# Altium PCB PCB1.PcbDoc
Units mm, origin at the board's own origin, x right, y up, seen from the top; angles counter-clockwise.
Board outline 100 x 100 mm, 4 copper layers (Top Layer, Internal Plane 1, Internal Plane 2, Bottom Layer); 103 components, 108 nets, 462 pads, 120 vias.
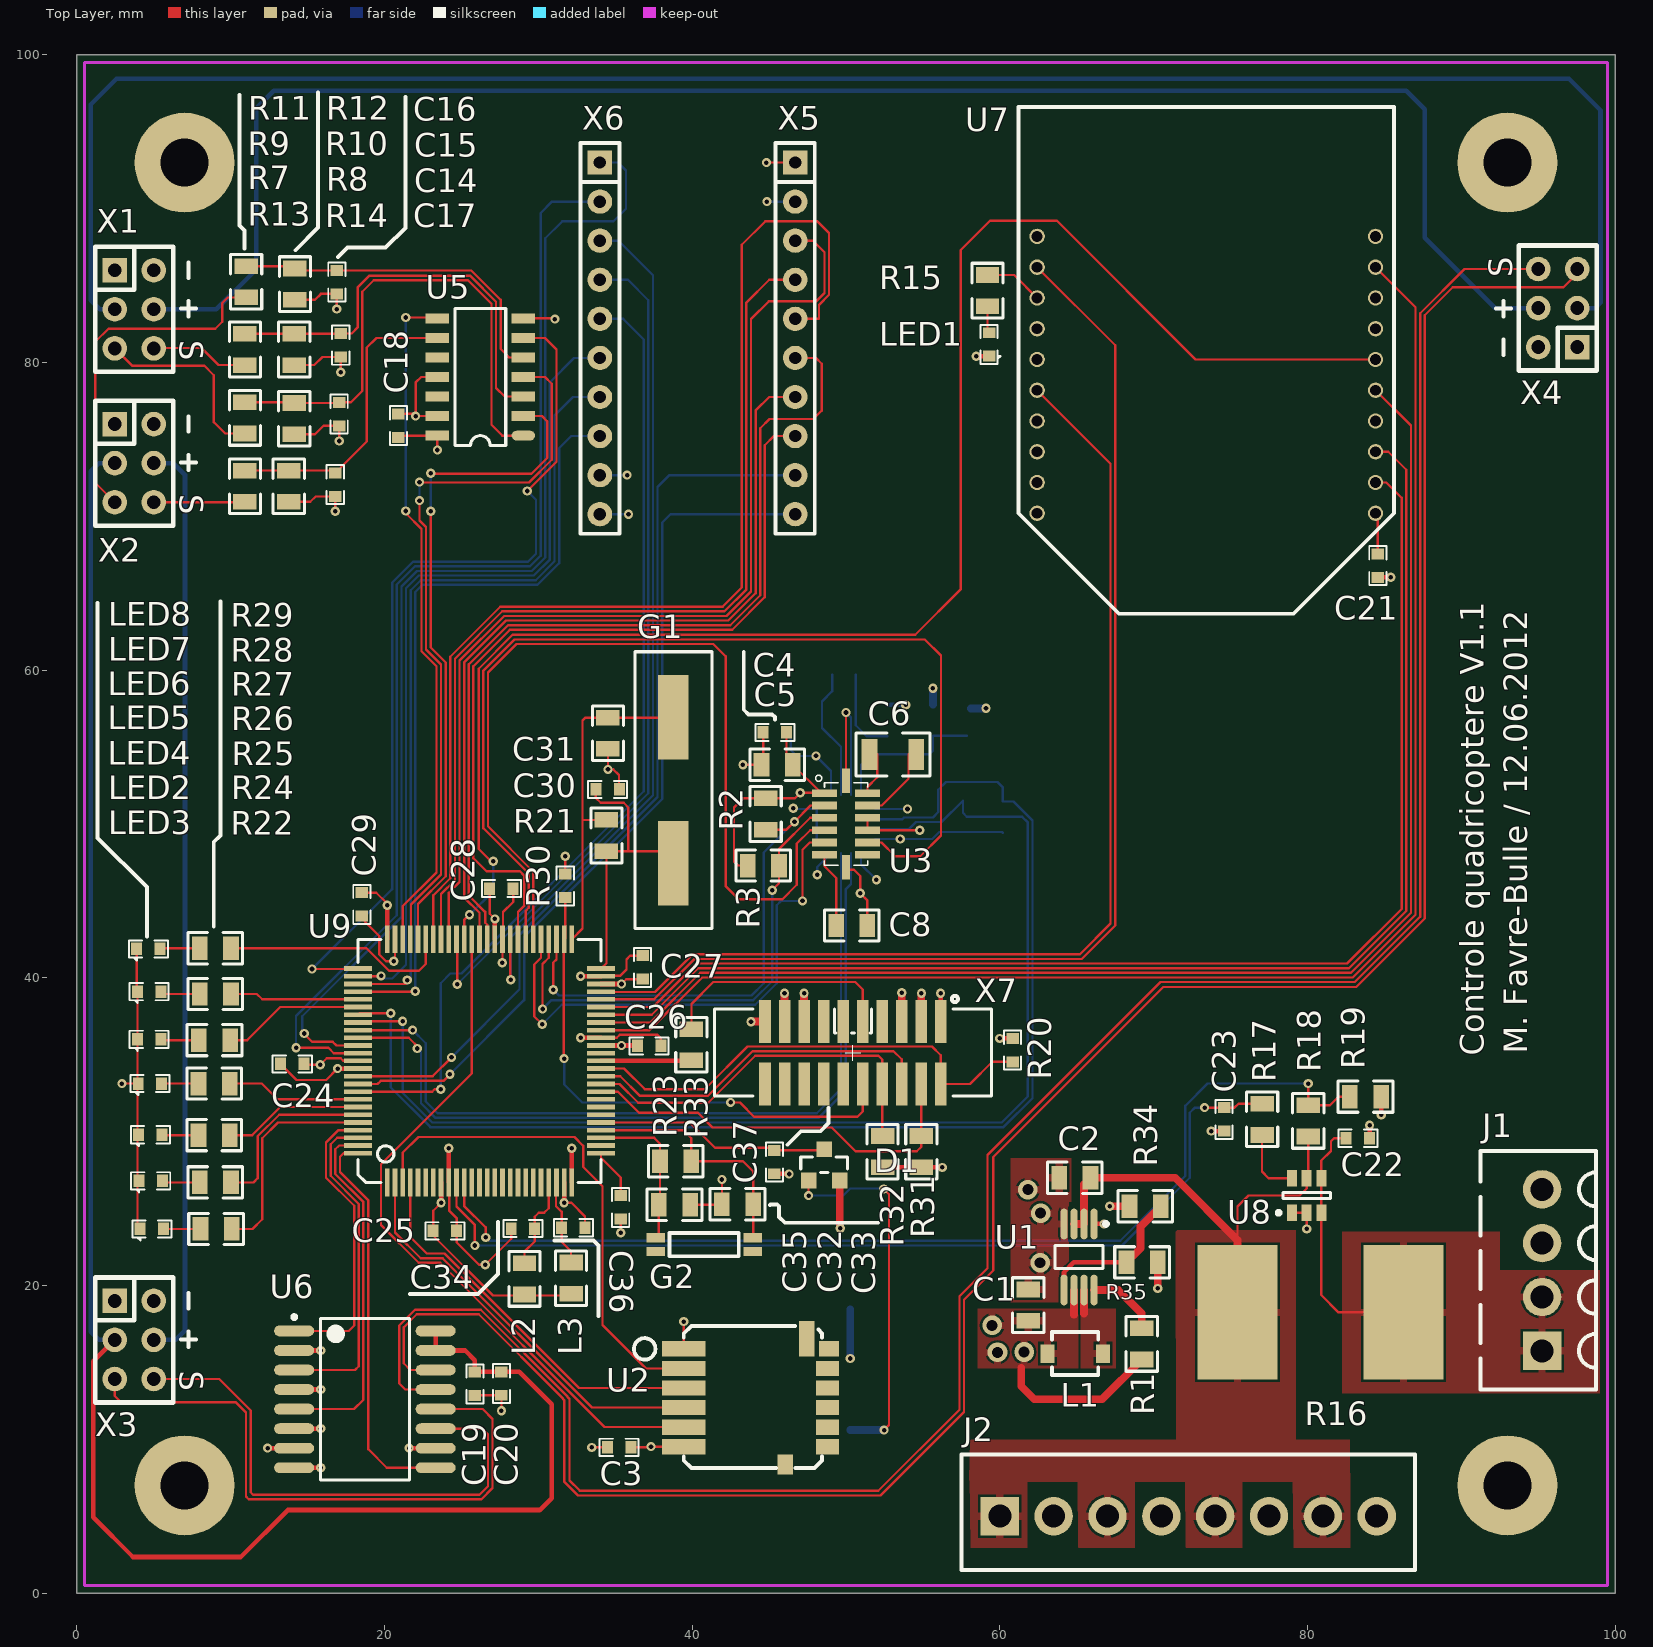
[diagram p0: Top Layer view]
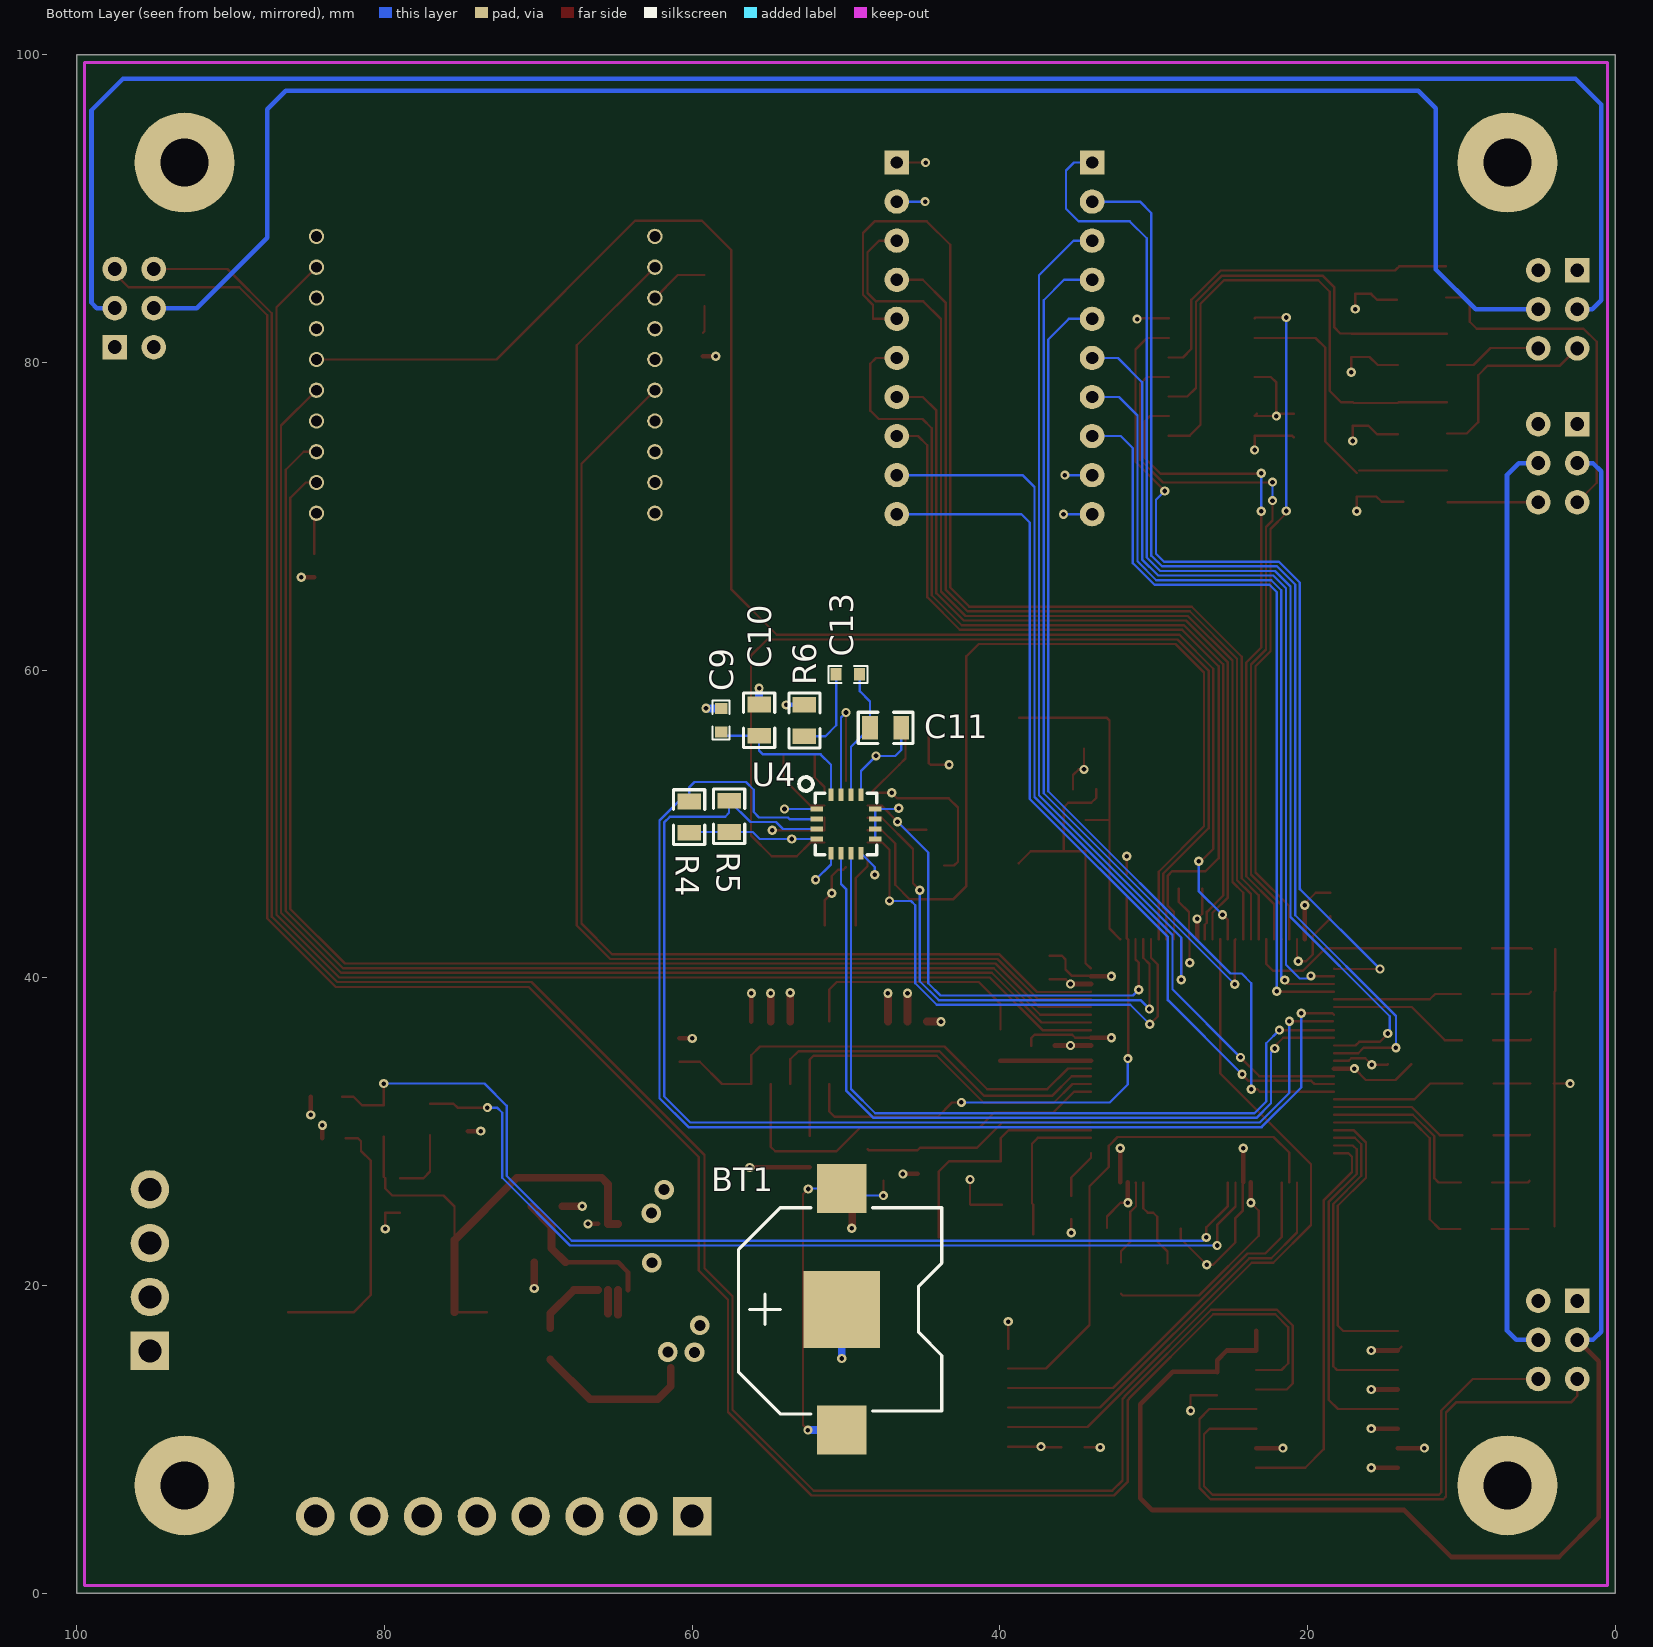
[diagram p1: Bottom Layer view, seen from below]
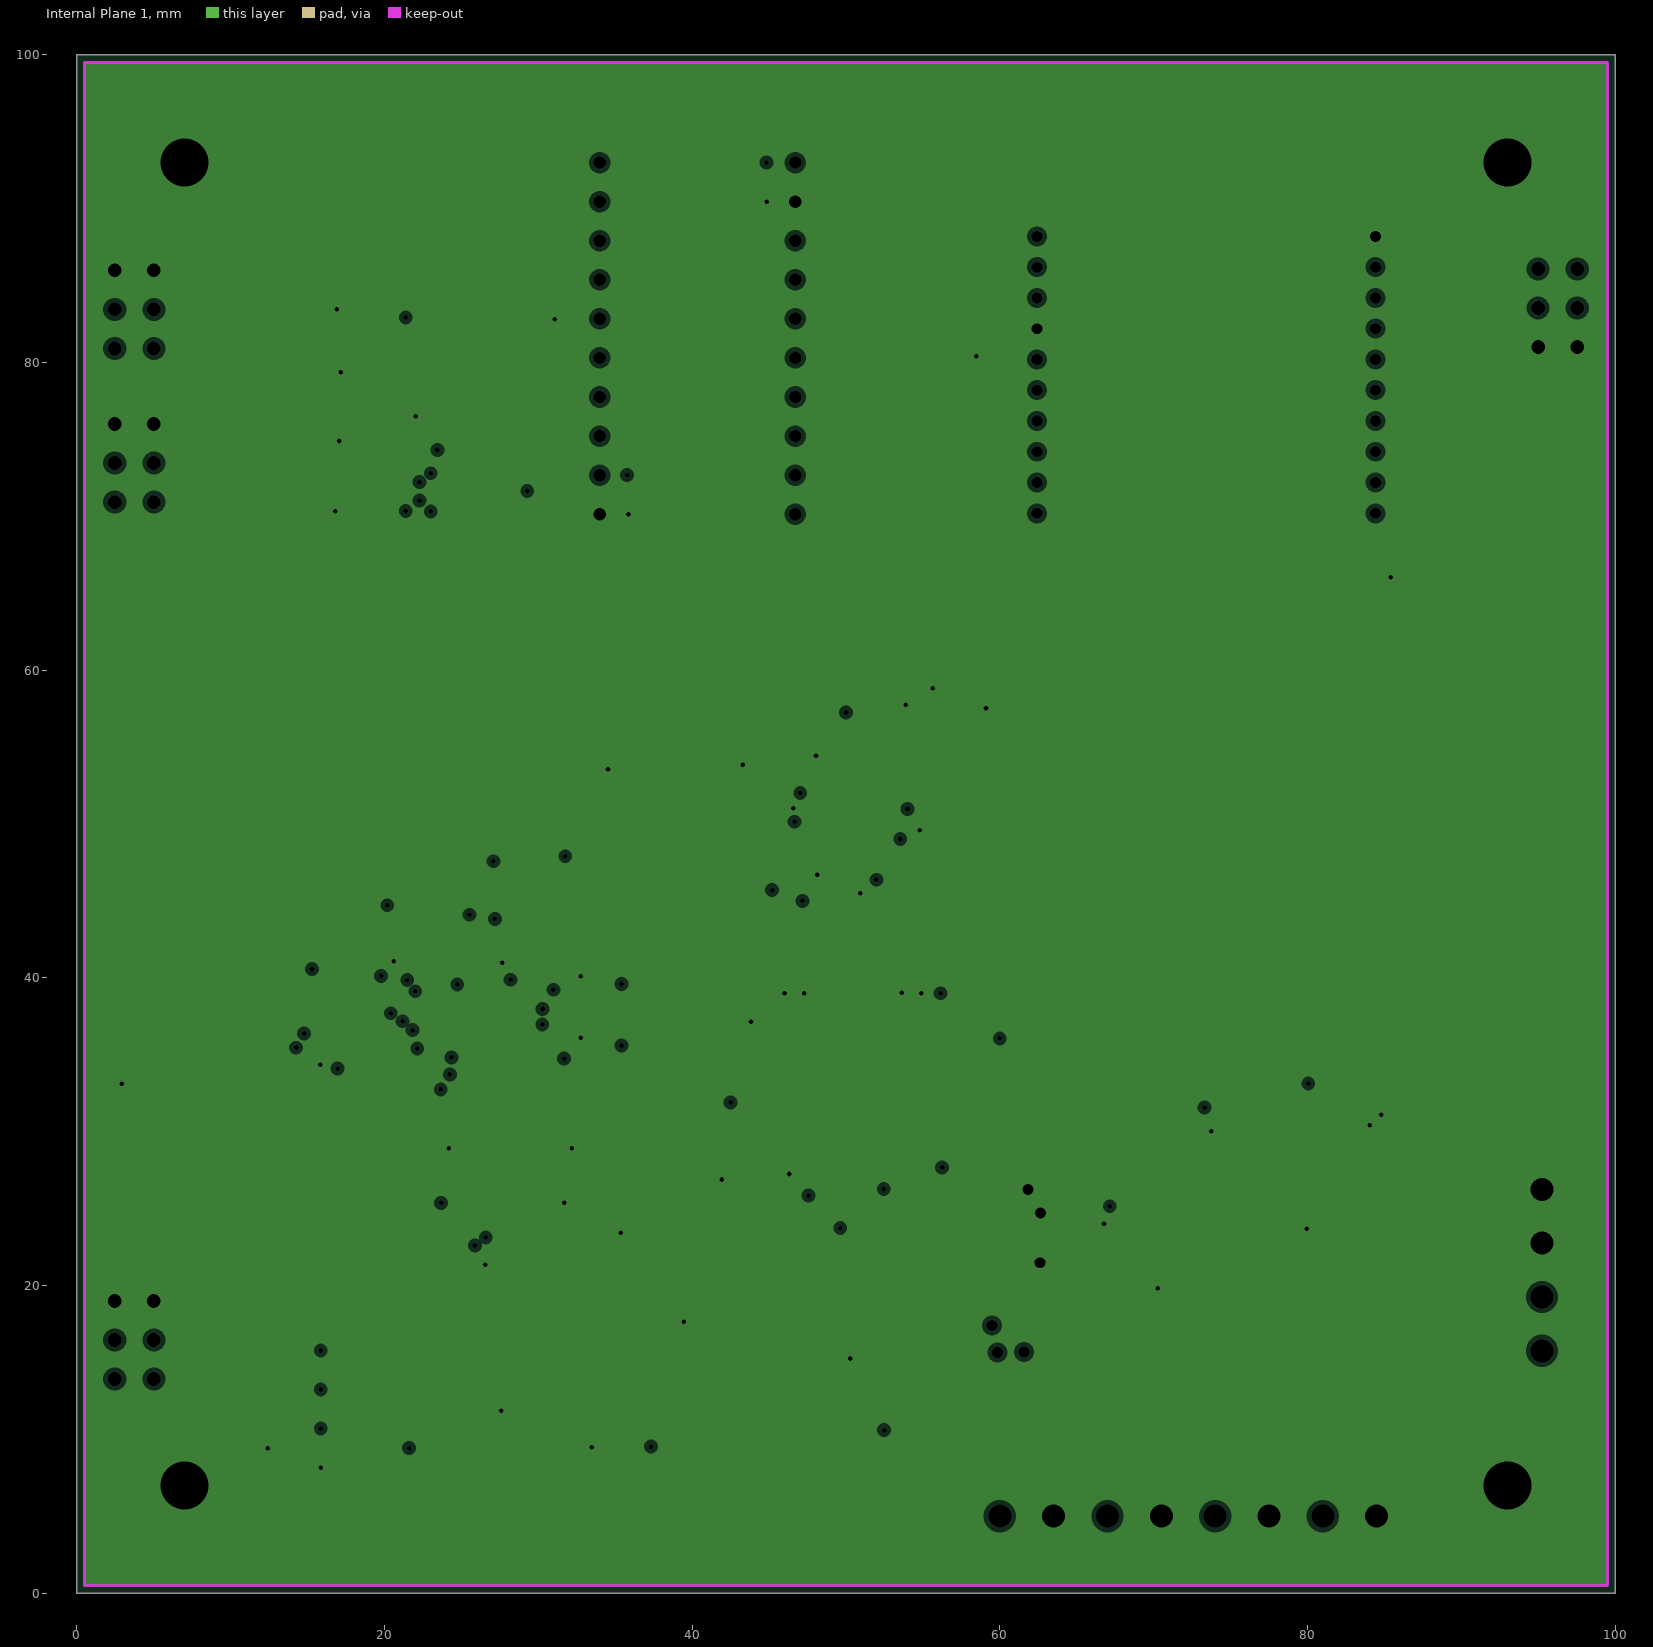
[diagram p2: Internal Plane 1, clearances drawn from the general rule]
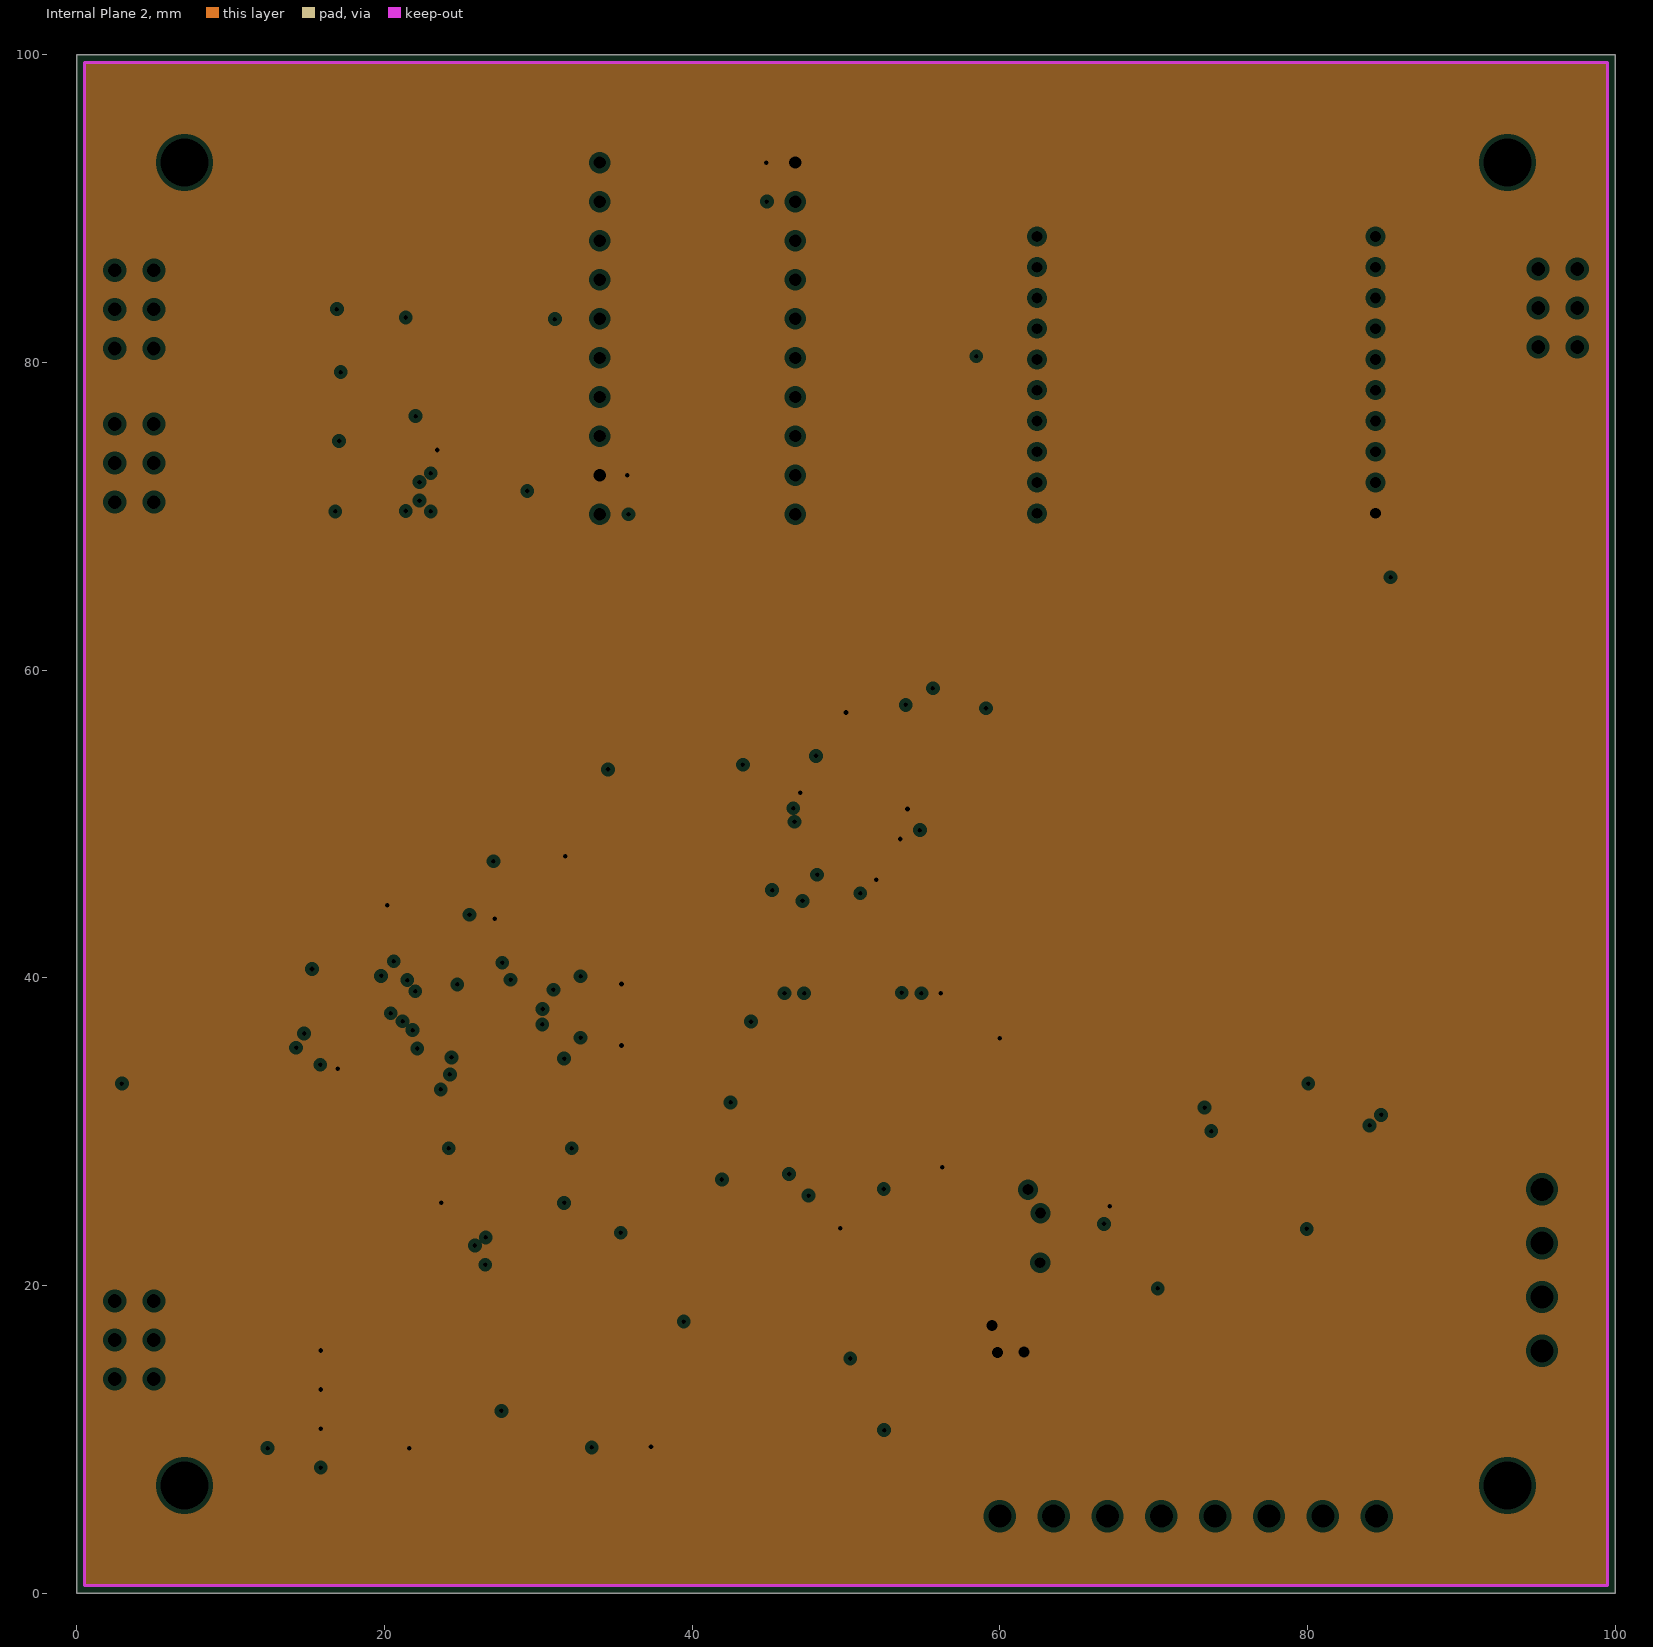
[diagram p3: Internal Plane 2, clearances drawn from the general rule]

## Layer stack, top to bottom
Top Layer: signal copper 0.0356
Dielectric: core 0.32, FR-4, Dk 4.8
Internal Plane 1: plane copper 0.0356, net GND
Dielectric: prepreg 0.32, FR-4, Dk 4.8
Internal Plane 2: plane copper 0.0356, net 3.3V
Dielectric: core 0.32, FR-4, Dk 4.8
Bottom Layer: signal copper 0.0356

## Board outline
0,0 100,0 100,100 0,100

## Design rules (kind name [scope] priority, off if disabled: settings)
Clearance [All] p1: gap=0.15
HoleSize [All] p1: absolutevalues=TRUE maxlimit=5 minlimit=0.3 maxpercent=80.000 minpercent=20.000
PlaneClearance [All] p1: clearance=0.3
PlaneConnect [All] p1: planeconnectstyle=Relief reliefexpansion=0.3 reliefentries=4 reliefconductorwidth=0.254 reliefairgap=0.2
PolygonConnect [All] p1: connectstyle=Relief reliefconductorwidth=0.5 reliefentries=4 polygonreliefangle="90 Angle"
RoutingVias [All] p1: holewidth=0.3 width=0.6 viastyle="Through Hole" minholewidth=0.3 minwidth=0.6 maxholewidth=0.3 maxwidth=0.6
SilkscreenOverComponentPads [All] p1: minsilkscreentomaskgap=0.254
SolderMaskExpansion [All] p1: expansion=0.102
Width [All] p1: maxlimit=5 minlimit=0.15 preferedwidth=0.3
24 further rules are at their usual default settings.

## Classes and differential pairs
component class Microcontroleur: BT1 C24 C25 C26 C27 C28 C29 C30 C31 C32 C33 C34 C35 C36 C37 D1 G1 G2 L2 L3 LED2 LED3 LED4 LED5 LED6 LED7 LED8 R20 R21 R22 R23 R24 R25 R26 R27 R28 R29 R30 R31 R32 R33 U9 X7
component class MesureAlimentation: C22 C23 J1 J2 R16 R17 R18 R19 U8
component class InterfaceExtension: X5 X6
component class InterfaceDataTelemetrie: C21 LED1 R15 U7
component class ControlCommande&Motors: C14 C15 C16 C17 C18 C19 C20 R7 R8 R9 R10 R11 R12 R13 R14 U5 U6 X1 X2 X3 X4
component class Capteurs: C3 C4 C5 C6 C8 C9 C10 C11 C13 R2 R3 R4 R5 R6 U2 U3 U4
component class Alimentation: C1 C2 L1 R1 R34 R35 U1

## Components (designator, comment, footprint, x,y, rotation, side; value= is the part's Value field where it differs from the comment)
BT1 "3000TR" 3000TR 50.275,18.45 r270 bottom
C1 "C2012X5R1A226M/1.25" 080501 61.85,18.725 r90 top
C2 "GRM21BR61E106KA73L" 080501 64.875,27 r180 top
C3 "GRM188R71E104KA01D" 060301 35.25,9.475 r90 top
C4 "GRM188R71E104KA01D" 060301 45.375,55.95 r270 top
C5 "08056D106KAT2A" 080501 45.525,53.85 r0 top
C6 "UMK212F224ZD-T" 120601 53.05,54.525 r180 top
C8 "C0805C475K4PACTU" 080501 50.375,43.4 r0 top
C9 "GRM188R71E104KA01D" 060301 58.125,56.75 r0 bottom
C10 "08056D106KAT2A" 080501 55.65,56.75 r270 bottom
C11 "C0805C103K4RACTU" 080501 47.425,56.25 r0 bottom
C13 "C2012Y5V1H474Z/0.85" 060301 49.875,59.725 r270 bottom
C14 "GRM188R71E104KA01D" 060301 17.05,76.65 r180 top
C15 "GRM188R71E104KA01D" 060301 17.15,81.125 r180 top
C16 "GRM188R71E104KA01D" 060301 16.9,85.225 r180 top
C17 "GRM188R71E104KA01D" 060301 16.8,72.059 r180 top
C18 "GRM188R71E104KA01D" 060301 20.9,75.9 r0 top
C19 "GRM188R71E104KA01D" 060301 25.875,13.6 r180 top
C20 "GRM188R71E104KA01D" 060301 27.6,13.625 r180 top
C21 "GRM188R71E104KA01D" 060301 84.575,66.8 r180 top
C22 "GRM188R71E104KA01D" 060301 83.275,29.575 r270 top
C23 "GRM188R71E104KA01D" 060301 74.575,30.8 r180 top
C24 "GRM188R71E104KA01D" 060301 14,34.4 r270 top
C25 "GRM188R71E104KA01D" 060301 23.925,23.55 r270 top
C26 "GRM188R71E104KA01D" 060301 37.2,35.575 r270 top
C27 "GRM188R71E104KA01D" 060301 36.775,40.675 r0 top
C28 "GRM188R71E104KA01D" 060301 27.6,45.8 r270 top
C29 "GRM188R71E104KA01D" 060301 18.525,44.775 r180 top
C30 "GQM2195C1H200JB01D" 060301 34.5,52.25 r270 top
C31 "GQM2195C1H200JB01D" 080501 34.525,55.9 r270 top
C32 "GRM21A5C2E120JW01D" 080501 38.85,25.25 r0 top
C33 "GRM21A5C2E120JW01D" 080501 42.95,25.275 r180 top
C34 "GRM188R71E104KA01D" 060301 29,23.7 r90 top
C35 "GRM188R71E104KA01D" 060301 35.35,25.075 r0 top
C36 "GRM188R71E104KA01D" 060301 32.275,23.75 r90 top
C37 "GRM188R71E104KA01D" 060301 45.35,28.025 r0 top
D1 "BAT54C" SOT2301 49.6,26.825 r180 top
G1 "ECS-40-20-5PX-TR" Crystal 38.775,52.2 r90 top
G2 "ECS-.327-12.5-38" Crystal2 40.775,22.65 r180 top
J1 "CON4" SL354D 95.25,15.75 r90 top
J2 "CON8" SL358D 60,5 r0 top
L1 "VLF3012ST-2R2M1R4" InductanceAlim 64.9,15.575 r180 top
L2 "BLM21AG601SN1D" 080501 29.1,20.425 r90 top
L3 "BLM21AG601SN1D" 080501 32.125,20.475 r90 top
LED1 "LG L29K-G2J1-24-Z" 060301_led 59.3,81.175 r180 top
LED2 "LG L29K-G2J1-24-Z" 060301_led 4.8,26.8 r90 top
LED3 "LG L29K-G2J1-24-Z" 060301_led 4.875,23.675 r90 top
LED4 "LG L29K-G2J1-24-Z" 060301_led 4.775,29.8 r90 top
LED5 "LG L29K-G2J1-24-Z" 060301_led 4.75,33.125 r90 top
LED6 "LG L29K-G2J1-24-Z" 060301_led 4.7,36 r90 top
LED7 "LG L29K-G2J1-24-Z" 060301_led 4.7,39.1 r90 top
LED8 "LG L29K-G2J1-24-Z" 060301_led 4.65,41.875 r90 top
R1 "ERJ-6GEYJ104V" 080501 69.225,16.2 r270 top
R2 "ERJ-6GEYJ103V" 080501 44.775,50.65 r90 top
R3 "ERJ-6GEYJ103V" 080501 44.625,47.3 r180 top
R4 "ERJ-6GEYJ103V" 080501 60.2,50.45 r270 bottom
R5 "ERJ-6GEYJ103V" 080501 57.6,50.5 r270 bottom
R6 "ERJ-6GEYJ103V" 080501 52.7,56.725 r90 bottom
R7 "RMCF0805JT820R" 080501 10.925,76.4 r90 top
R8 "ERJ-6GEYJ162V" 080501 14.125,76.35 r270 top
R9 "RMCF0805JT820R" 080501 10.925,80.85 r90 top
R10 "ERJ-6GEYJ162V" 080501 14.125,80.85 r270 top
R11 "RMCF0805JT820R" 080501 11,85.25 r90 top
R12 "ERJ-6GEYJ162V" 080501 14.175,85.1 r270 top
R13 "RMCF0805JT820R" 080501 10.925,71.959 r90 top
R14 "ERJ-6GEYJ162V" 080501 13.775,71.959 r270 top
R15 "RMCF0805JT820R" 080501 59.2,84.675 r270 top
R16 "WSLP59313L000FEB" 5.2x8.75 86.25,18.25 r0 top
R17 "ERJ-6GEYJ103V" 080501 77.05,30.8 r90 top
R18 "ERJ-6GEYJ822V" 080501 80.05,30.7 r90 top
R19 "ERJ-6GEYJ162V" 080501 83.775,32.275 r0 top
R20 "RC0603FR-071KL" 060301 60.825,35.3 r180 top
R21 "RMCF0805JT820R" 080501 34.425,49.25 r270 top
R22 "RMCF0805JT820R" 080501 9.05,23.675 r180 top
R23 "ERJ-6GEYJ103V" 080501 38.925,28.075 r180 top
R24 "RMCF0805JT820R" 080501 9,26.7 r180 top
R25 "RMCF0805JT820R" 080501 8.925,29.775 r180 top
R26 "RMCF0805JT820R" 080501 8.925,33.125 r180 top
R27 "RMCF0805JT820R" 080501 8.95,35.95 r180 top
R28 "RMCF0805JT820R" 080501 9,38.95 r180 top
R29 "RMCF0805JT820R" 080501 9,41.925 r180 top
R30 "RC0603FR-071KL" 060301 31.75,45.975 r180 top
R31 "ERJ-6GEYJ103V" 080501 54.9,28.7 r270 top
R32 "ERJ-6GEYJ103V" 080501 52.375,28.7 r270 top
R33 "RMCF0805JT820R" 080501 39.95,35.65 r270 top
R34 "ERJ-6GEYJ104V" 080501 69.45,25.15 r180 top
R35 "ERJ-6GEYJ104V" 080501 69.25,21.5 r180 top
U1 "TPS62160DGK" TSOP65P490-8AM 65.15,21.85 r270 top
U2 "MS5534-CM" MS5534B 39.45,15.875 r180 top
U3 "LSM303DLHCTR" LGA-14L 50,50 r90 top
U4 "L3G4200DTR" LGA-16 50,50 r180 bottom
U5 "SN74AHC14D" SO1401 29.025,75.25 r180 top
U6 "MIC4468ZWM" SOIC127P1030-16M 18.725,12.6 r0 top
U7 "XBP24BZ7WIT-004J" XBee-Pro 73.425,88.2 r180 top
U8 "MAX4173TEUT+T" SOT26A-6AM 79.95,25.85 r90 top
U9 "MK10DN512ZVLL10" QFP100-1 20.175,26.7 r0 top
X1 "CON6/CP" J2X3_2.54 5,86 r270 top
X2 "CON6/CP" J2X3_2.54 5,76 r270 top
X3 "CON6/CP" J2X3_2.54 5,19 r270 top
X4 "CON6/CP" J2X3_2.54 95,81 r90 top
X5 "CON10" SIP10 46.7,93 r270 top
X6 "CON10" SIP10 34,93 r270 top
X7 "FTSH-110-01-l-DV-K" FTSH-110-01-X-DV-EJ 50.45,35.125 r180 top

## Footprints (in the part's own frame and the unit in brackets; to place one, negate y for a bottom-side part, rotate by r counter-clockwise, add the part's x,y. Pads: shape width x height; smd on the part's side, far side on the other; paste and mask are expansions set on the pad)
5.2x8.75 [mm] "PowerResistorFootPrint"
  rect 5.2x8.75 smd: 1(0,0) 2(-10.8,0)
3000TR [mm] "HOLDER BATTERY COIN 12MM DIA SMD"
  rect 3.2x3.2 smd: 1(-7.85,0) 3(7.85,0)
  rect 5x5 smd: 2(0,0)
  silkscreen extent -6.6,-6.7 6.8,6.5
060301 [mil]
  rect 32.01x27.99 smd: 1(0,-30) 2(0,30)
  silkscreen extent -22,-50 22,50
060301_led [mil] "LED"
  rect 32.01x27.99 smd: 1(0,-30) 2(0,30)
  silkscreen extent -30,-50 22,50
080501 [mil]
  rect 40x60 smd: 1(-40,0) 2(40,0)
  silkscreen extent -70,-40 70,40
120601 [mil]
  rect 40x80 smd: 1(-60,0) 2(60,0)
  silkscreen extent -95,-55 95,55
Crystal [mm]
  rect 5.5x2 smd: 1(-4.75,0) 2(4.75,0)
  silkscreen extent -9,-2.5 9,2.5
Crystal2 [mm]
  rect 1.2x0.6 smd: 1(-3.15,-0.45) 2(3.15,-0.45) 3(3.15,0.45) 4(-3.15,0.45)
  silkscreen extent -2.25,-0.75 2.25,0.75
FTSH-110-01-X-DV-EJ [mm] "1.27mm pitch, 20 pin, terminal strip; vertical, double row, w/ejector shroud, SMT"
  rect 0.75x2.8 smd mask+0: 1(-5.715,-2.032) 2(-5.715,2.032) 3(-4.445,-2.032) 4(-4.445,2.032) 5(-3.175,-2.032) 6(-3.175,2.032) 7(-1.905,-2.032) 8(-1.905,2.032) 9(-0.635,-2.032) 10(-0.635,2.032) 11(0.635,-2.032) 12(0.635,2.032) 13(1.905,-2.032) 14(1.905,2.032) 15(3.175,-2.032) 16(3.175,2.032) 17(4.445,-2.032) 18(4.445,2.032) 19(5.715,-2.032) 20(5.715,2.032)
  silkscreen extent -9,-3.7 9,2.8
InductanceAlim [mm]
  rect 0.9x1.2 smd: 1(-1.8,0) 2(1.8,0)
  silkscreen extent -1.5,-1.4 1.5,1.4
J2X3_2.54 [mm]
  rect 1.6x1.6 hole 0.9: 1(0,-2.54)
  round 1.6 hole 0.9: 2(0,0) 3(2.54,-2.54) 4(2.54,0) 5(5.08,-2.54) 6(5.08,0)
  silkscreen extent -1.52,-3.81 6.6,2.75
LGA-14L [mm]
  rect 0.5x1.6 smd: 1(2,1.4) 2(1.2,1.4) 3(0.4,1.4) 4(-0.4,1.4) 5(-1.2,1.4) 6(-2,1.4) 8(-2,-1.4) 9(-1.2,-1.4) 10(-0.4,-1.4) 11(0.4,-1.4) 12(1.2,-1.4) 13(2,-1.4)
  rect 1.6x0.5 smd: 7(-2.8,0) 14(2.8,0)
  silkscreen extent -2.67,-1.4 3.17,1.98
LGA-16 [mm]
  rect 0.8x0.3 smd: 1(-1.9,0.975) 2(-1.9,0.325) 3(-1.9,-0.325) 4(-1.9,-0.975) 9(1.9,-0.975) 10(1.9,-0.325) 11(1.9,0.325) 12(1.9,0.975)
  rect 0.3x0.8 smd: 5(-0.975,-1.9) 6(-0.325,-1.9) 7(0.325,-1.9) 8(0.975,-1.9) 13(0.975,1.9) 14(0.325,1.9) 15(-0.325,1.9) 16(-0.975,1.9)
  silkscreen extent -3.05,-2 2,3.05
MS5534B [mm] "Barometer Module"
  rect 2.8x1 smd: 1(0,0) 2(0,1.27) 3(0,2.54) 4(0,3.81) 5(0,5.08) 6(0,6.35)
  rect 1x1.3 smd: 7(-6.6,7.525)
  rect 1x2.3 smd: 8(-8,-0.65)
  rect 1.5x1 smd: 9(-9.35,6.35) 10(-9.35,5.08) 11(-9.35,3.81) 12(-9.35,2.54) 13(-9.35,1.27)
  rect 1.3x1 smd: 14(-9.45,0)
  silkscreen extent -9,-1.5 3.24,7.75
QFP100-1 [mil]
  rect 12.01x70.98 smd: 1(0,0) 2(19.69,0)
  rect 12x71 smd: 3(39.37,0) 4(59.06,0) 5(78.74,0) 6(98.43,0) 7(118.11,0) 8(137.8,0) 9(157.48,0) 10(177.17,0) 11(196.85,0) 12(216.54,0) 13(236.22,0) 14(255.91,0) 15(275.59,0) 16(295.28,0) 17(314.96,0) 18(334.65,0) 19(354.33,0) 20(374.02,0) 21(393.7,0) 22(413.39,0) 23(433.07,0) 24(452.76,0) 25(472.44,0) 51(472.44,622.05) 52(452.76,622.05) 53(433.07,622.05) 54(413.39,622.05) 55(393.7,622.05) 56(374.02,622.05) 57(354.33,622.05) 58(334.65,622.05) 59(314.96,622.05) 60(295.28,622.05) 61(275.59,622.05) 62(255.91,622.05) 63(236.22,622.05) 64(216.54,622.05) 65(196.85,622.05) 66(177.17,622.05) 67(157.48,622.05) 68(137.8,622.05) 69(118.11,622.05) 70(98.43,622.05) 71(78.74,622.05) 72(59.06,622.05) 73(39.37,622.05) 74(19.69,622.05) 75(0,622.05)
  rect 71x12 smd: 26(547.24,74.8) 27(547.24,94.49) 28(547.24,114.17) 29(547.24,133.86) 30(547.24,153.54) 31(547.24,173.23) 32(547.24,192.91) 33(547.24,212.6) 34(547.24,232.28) 35(547.24,251.97) 36(547.24,271.65) 37(547.24,291.34) 38(547.24,311.02) 39(547.24,330.71) 40(547.24,350.39) 41(547.24,370.08) 42(547.24,389.76) 43(547.24,409.45) 44(547.24,429.13) 45(547.24,448.82) 46(547.24,468.5) 47(547.24,488.19) 48(547.24,507.87) 49(547.24,527.56) 50(547.24,547.24) 77(-74.8,527.56) 78(-74.8,507.87) 79(-74.8,488.19) 80(-74.8,468.5) 81(-74.8,448.82) 82(-74.8,429.13) 83(-74.8,409.45) 84(-74.8,389.76) 85(-74.8,370.08) 86(-74.8,350.39) 87(-74.8,330.71) 88(-74.8,311.02) 89(-74.8,291.34) 90(-74.8,271.65) 91(-74.8,251.97) 92(-74.8,232.28) 93(-74.8,212.6) 94(-74.8,192.91) 95(-74.8,173.23) 96(-74.8,153.54) 97(-74.8,133.86) 98(-74.8,114.17) 99(-74.8,94.49) 100(-74.8,74.8)
  rect 70.98x12.01 smd: 76(-74.8,547.24)
  silkscreen extent -75,0 547,622
SIP10 [mil]
  rect 62x63 hole 31.5: 1(0,0)
  oval 62x63 hole 31.5: 2(100,0) 3(200,0) 4(300,0) 5(400,0) 6(500,0) 7(600,0) 8(700,0) 9(800,0) 10(900,0)
  silkscreen extent -50,-50 950,50
SL354D [mm]
  rect 2.5x2.5 hole 1.5: 1(0,0)
  round 2.5 hole 1.5: 2(3.5,0) 3(7,0) 4(10.5,0)
  silkscreen extent -2.5,-3.5 13,4
SL358D [mm]
  rect 2.5x2.5 hole 1.5: 1(0,0)
  round 2.5 hole 1.5: 2(3.5,0) 3(7,0) 4(10.5,0) 5(14,0) 6(17.5,0) 7(21,0) 8(24.5,0)
  silkscreen extent -2.5,-3.5 27,4
SO1401 [mil]
  oval 60x25 smd: 1(0,0)
  rect 60x25 smd: 2(0,-50) 3(0,-100) 4(0,-150) 5(0,-200) 6(0,-250) 7(0,-300) 8(220,-300) 9(220,-250) 10(220,-200) 11(220,-150) 12(220,-100) 13(220,-50) 14(220,0)
  silkscreen extent 45,-325 175,25
SOIC127P1030-16M [mm] "SOIC, 16-Leads, Body 10.3x7.5mm, Pitch 1.27mm, IPC Low Density"
  oval 2.6x0.7 smd: 1(-4.6,4.445) 2(-4.6,3.175) 3(-4.6,1.905) 4(-4.6,0.635) 5(-4.6,-0.635) 6(-4.6,-1.905) 7(-4.6,-3.175) 8(-4.6,-4.445) 9(4.6,-4.445) 10(4.6,-3.175) 11(4.6,-1.905) 12(4.6,-0.635) 13(4.6,0.635) 14(4.6,1.905) 15(4.6,3.175) 16(4.6,4.445)
  silkscreen extent -4.72,-5.25 2.9,5.47, body extent -3.75,-5.25 3.75,5.25, height 2.65
SOT26A-6AM [mm]
  rect 1.05x0.65 smd: 1(-1.125,0.95) 2(-1.125,0) 3(-1.125,-0.95) 4(1.125,-0.95) 5(1.125,0) 6(1.125,0.95)
  silkscreen extent -1.25,-1.55 0.2,1.95, body extent -0.9,-1.55 0.9,1.55
SOT2301 [mil]
  rect 40x40 smd: 1(80,0) 2(0,0) 3(40,-80)
  silkscreen extent -20,-60 100,-20
TSOP65P490-8AM [mm] "TSOP, 8-Leads, Body 3x3mm, Pitch 0.65mm, IPC Low Density"
  oval 2x0.45 smd: 1(-2.15,0.975) 2(-2.15,0.325) 3(-2.15,-0.325) 4(-2.15,-0.975) 5(2.15,-0.975) 6(2.15,-0.325) 7(2.15,0.325) 8(2.15,0.975)
  silkscreen extent -2.27,-1.55 0.75,1.88, body extent -1.6,-1.6 1.6,1.6, height 1.1
XBee-Pro [mm]
  round 1 hole 0.7: 1(-11,18) 2(-11,16) 3(-11,14) 4(-11,12) 5(-11,10) 6(-11,8) 7(-11,6) 8(-11,4) 9(-11,2) 10(-11,0) 11(11,0) 12(11,2) 13(11,4) 14(11,6) 15(11,8) 16(11,10) 17(11,12) 18(11,14) 19(11,16) 20(11,18)
  silkscreen extent -12.2,-8.41 12.2,24.53

## Part data
BT1: library part BAT_1, "HOLDER BATTERY COIN 12MM DIA SMD"
C1 C2 C3 C4 C5 C6 C8 C9 C10 C11 C13 C14 C15 C16 C17 C18 C19 C20 C21 C22 C23 C24 C25 C26 C27 C28 C29 C30 C31 C32 C33 C34 C35 C36 C37: library part CAPA, "CAPA"
D1: "DIODE SCHTTKY CC 200MA 30V SOT23"
G1 G2: library part CRYSTAL
L1: library part INDUCTOR
L2 L3: library part "Ferrite Bead", "FERRITE CHIP 600 OHM 200MA 0805"
LED1 LED2 LED3 LED4 LED5 LED6 LED7 LED8: library part LED
R1 R2 R3 R4 R5 R6 R7 R8 R9 R10 R11 R12 R13 R14 R15 R16 R17 R18 R19 R21 R22 R23 R24 R25 R26 R27 R28 R29 R31 R32 R33 R34 R35: library part RES
R20 R30: library part RES, "RES 1.00K OHM 1/10W 1% 0603 SMD"
U1: library part TPS62160, "IC BUCK SYNC ADJ 1A 8MSOP"
U2: library part MS5534B, "Barometer Module"
U3: library part LSM303DLHC, "Accéléromètre et magnétomètre"
U4: library part L3G4200D, "Gyroscope"
U6: library part MIC4468
U7: library part "MaxStream XBee-PRO"
U8: library part Max4173, "Amplificateur capteur de courant"
X1: "Connecteur récepteur télécommande cannaux 1 & 2"
X2: "Connecteur récepteur télécommande cannaux 3 & 4"
X3: "Connecteur contrôleur moteurs 3 (arrière) & 4 (gauche)"
X4: "Connecteur contrôleur moteurs 1 (avant) & 2 (droite)"
X7: library part CON20_JTAG, "CONN UNSHROUDED HDR 20POS .05\""

## Free pads (board coordinates)
  round 6.5 hole 3.1: ""(7,7) ""(7,93) ""(93,7) ""(93,93)

## Via types
v1: diameter 0.6, hole 0.3, Top Layer to Bottom Layer, 114 vias
v2: diameter 1.27, hole 0.711, Top Layer to Bottom Layer, 6 vias

## Nets (pads, with @x,y where several pads share a name; then routed paths per layer and width w, separated by ;. In a path a pad name is that pad's centre, name@x,y a point inside that pad or via, vN(x,y) a via of type N, cw(c..) or ccw(c..) an arc to the next point about the centre after c; other vN are vias at no path point)
3.3V: C1.1 C3.1 C4.2 C5.2 C18.1 C21.1 C24.1 C25.1 C26.1 C27.1 C28.1 C29.1 D1.2 L1.2 L2.1 L3.1 R1.2 R2.2 R3.2 R4.2 R5.2 R20.1 R30.1 R31.2 R32.2 R34.2 U1.6 U2.6 U3.1 U3.14 U4.1 U4.4 U4.5 U4.15 U5.14 U6.2 U6.4 U6.6 U6.10 U7.1 U9.8 U9.40 U9.48 U9.61 U9.75 U9.89 X5.1 X6.9 X7.1 | length 116.5
  Top Layer w0.15: C24.1 14.275,33.363 16.209,33.363 v1(16.946,34.1) ; U6.2@13.887,16.013 U6.2 ; C29.1 19.463,45.537 20.175,44.825 v1(20.175,44.72) ; C18.1 21.012,75.25 U5.14 v1(23.437,74.312) ; v1(23.675,25.372) 23.163,24.859 C25.1 23.163,23.236 27.05,19.35 32.016,19.35 L3.1 ; C28.1 26.838,44.166 v1(27.175,43.829) ; R30.1 v1(31.75,47.9) ; v1(35.404,39.6) 35.717,39.913 C27.1 ; C3.1 37.275,9.475 v1(37.325,9.525) U2.6 ; R3.2 42.975,47.3 42.725,47.55 42.725,51.075 43.316,51.666 R2.2 46.666,51.666 v1(47.025,52.025) U3.1@48.366,52.025 ; v1(44.825,93) X5.1 ; C4.2 46.137,54.254 C5.2 U3.1@48.366,52.025 ; U3.1@48.575,52.025 U3.1@48.366,52.025 ; U3.1 48.391,52 U3.1@48.366,52.025 ; U3.14 v1(50,57.25) ; v1(51.975,46.375) v1@52,46.375 ; U7.1 84.575,70.05 C21.1
  Top Layer w0.3: U6.6 v1(15.852,10.695) ; U6.4 v1(15.852,13.235) ; U6.2 v1(15.852,15.775) ; v1(16.946,34.1) U9.89 ; U9.75 v1(20.175,44.72) ; v1(21.598,9.425) U6.10 ; v1(23.675,25.372) U9.8 ; U9.61 v1(27.175,43.829) ; U9.40 v1(35.404,35.6) 36.413,35.6 C26.1 ; U9.48 v1(35.404,39.6) ; R32.2 R31.2 56.241,27.684 v1(56.25,27.675) ; v1(56.15,39) 56.165,38.985 X7.1 ; v1(59.991,36.062) 60.249,36.062 R20.1
  Top Layer w0.5: v1@49.6,23.75 D1.2 ; 61.4,14.65 61.4,13.45 62.25,12.6 66.641,12.6 R1.2 ; 64.825,18.1 U1.6 ; v1(67.15,25.15) R34.2
  Bottom Layer w0.15: v1@23.425,74.3 v1(23.437,74.312) ; v1@31.725,47.925 v1(31.75,47.9) ; X6.9 v1(35.77,72.68) v1@35.8,72.65 ; v1@37.3,9.55 v1(37.325,9.525) ; v1@44.8,92.975 v1(44.825,93) ; v1@50.075,57.325 v1(50,57.25) 50.325,56.925 U4.15 ; U4.5 50.975,47.375 v1(51.975,46.375) ; U4.4 v1(53.525,49.025) 55.6,49.025 56.059,49.484 R5.2 60.15,49.484 R4.2 ; U4.1 v1(54,50.975)
  other v1: 49.625,23.725
  other v2: 59.85,15.65 61.575,15.675 59.5,17.4
5V_1: X1.3 X4.3 | length 128.4
  Bottom Layer w0.3: X1.3 1.49,83.46 0.9,84.05 0.9,96.775 2.575,98.45 97,98.45 99.05,96.4 99.05,83.875 98.715,83.54 X4.3
5V_2: X1.4 X4.4 | length 112.8
  Bottom Layer w0.3: X1.4 9.06,83.46 11.65,86.05 11.65,96.525 12.8,97.675 86.425,97.675 87.625,96.475 87.625,88.125 92.21,83.54 X4.4
5V_3: C19.1 C20.1 U6.15 U6.16 X2.3 X3.3 | length 120.9
  Top Layer w0.3: X3.3 1.075,15.075 1.075,4.925 3.65,2.35 10.65,2.35 13.7,5.4 30.1,5.4 30.875,6.175 30.875,12.275 28.763,14.387 C20.1 25.9,14.387 C19.1 25.875,15.15 25.25,15.775 U6.15 U6.16
  Bottom Layer w0.3: X3.3 1.44,16.46 0.9,17 0.9,72.925 1.435,73.46 X2.3
5V_4: X2.4 X3.4 | length 60.3
  Bottom Layer w0.3: X3.4 6.435,16.46 7.025,17.05 7.025,72.7 6.265,73.46 X2.4
CONNECTEURX1_CANAL1: R7.1 X1.5 | length 12.5
  Top Layer w0.15: X1.5 3.58,79.8 8.275,79.8 8.9,79.175 8.9,76.125 9.641,75.384 R7.1
CONNECTEURX1_CANAL2: R9.1 X1.6 | length 6.4
  Top Layer w0.15: X1.6@5.03,80.95 8.093,80.95 9.209,79.834 R9.1
CONNECTEURX2_CANAL3: R11.1 X2.5 | length 22.7
  Top Layer w0.15: X2.5 1.2,72.18 1.2,81.35 2.05,82.2 9,82.2 9.45,82.65 9.45,83.875 9.809,84.234 R11.1
CONNECTEURX2_CANAL4: R13.1 X2.6 | length 5.9
  Top Layer w0.15: X2.6 R13.1@10.902,70.92
CONNECTEURX3_DRIVERMOTEUR3: U6.12 X3.5 | length 40.4
  Top Layer w0.15: X3.5 2.46,12.816 2.875,12.4 10.349,12.4 11,11.749 11,6.274 11.174,6.1 26.3,6.1 27.025,6.825 27.025,11.325 26.385,11.965 U6.12
CONNECTEURX3_DRIVERMOTEUR4: U6.11 X3.6 | length 35.1
  Top Layer w0.15: X3.6 9.254,13.92 11.3,11.874 11.3,6.55 11.45,6.4 26.176,6.4 26.725,6.949 26.725,10.325 26.355,10.695 U6.11
CONNECTEURX4_DRIVERMOTEUR1: U6.14 X4.5 | length 154
  Top Layer w0.15: U6.14 21.695,14.505 21.25,14.95 21.25,17.275 22.1,18.125 26.124,18.125 31.6,12.649 31.6,12.626 31.675,12.551 31.675,7.25 32.575,6.35 52.25,6.35 57.675,11.775 57.675,19.075 59.575,20.975 59.575,28.35 70.625,39.4 83.171,39.4 87.625,43.854 87.625,83.076 89.449,84.9 96.65,84.9 97.54,85.79 X4.5
CONNECTEURX4_DRIVERMOTEUR2: U6.13 X4.6 | length 153.3
  Top Layer w0.15: U6.13 21.34,13.235 20.95,13.625 20.95,17.399 21.976,18.425 26.249,18.425 31.9,12.774 31.9,12.751 32.025,12.626 32.025,7.324 32.699,6.65 52.1,6.65 57.375,11.925 57.375,19.3 59.2,21.125 59.2,28.475 70.45,39.725 83.072,39.725 87.325,43.978 87.325,83.2 90.205,86.08 X4.6
GND: BT1.2 C1.2 C2.2 C3.2 C4.1 C5.1 C8.2 C9.1 C10.1 C11.1 C14.2 C15.2 C16.2 C17.2 C18.2 C19.2 C20.2 C21.2 C22.2 C23.2 C24.2 C25.2 C26.2 C27.2 C28.2 C29.2 C30.2 C31.2 C32.2 C33.2 C34.2 C35.1 C36.1 C37.1 J1.3 J1.4 J2.2 J2.4 J2.6 J2.8 LED1.2 LED2.2 LED3.2 LED4.2 LED5.2 LED6.2 LED7.2 LED8.2 pad. R6.2 R8.2 R10.2 R12.2 R14.2 R19.2 R35.1 U1.1 U1.4 U2.1 U3.7 U3.10 U3.11 U4.8 U4.9 U4.10 U4.11 U4.12 U4.13 U5.7 U5.11 U5.13 U6.7 U6.8 U7.10 U7.14 U8.1 U8.2 U9.9 U9.24 U9.25 U9.41 U9.49 U9.60 U9.74 U9.88 X1.1 X1.2 X2.1 X2.2 X3.1 X3.2 X4.1 X4.2 X5.2 X6.10 X7.3 X7.5 X7.15 X7.17 X7.19 | length 156.2
  Top Layer w0.15: v1(2.925,33.125) LED5.2@3.938,33.125 ; LED8.2 3.888,39.15 LED7.2 LED5.2@3.938,33.125 ; LED3.2@3.938,23.85 LED5.2@3.938,33.125 ; LED5.2 LED5.2@3.938,33.125 ; R14.2 15.168,70.943 15.522,71.297 C17.2 v1(16.8,70.325) ; R8.2 15.484,75.334 16.038,75.888 C14.2 v1(17.05,74.9) ; R10.2 15.434,79.834 15.963,80.363 C15.2 v1(17.15,79.375) ; R12.2 15.484,84.084 15.863,84.463 C16.2 v1(16.9,83.475) ; C24.2 14.812,34.35 v1(15.825,34.35) 16.25,34.775 17.15,34.775 17.325,34.6 U9.88 ; C29.2 18.525,43.85 19.65,42.725 19.65,41.524 20.099,41.075 v1(20.6,41.075) 20.675,41.15 U9.74 ; C18.2 21.878,76.662 v1(22.02,76.52) ; U5.13@23.295,76.662 U5.13 v1(22.02,76.52) ; U5.11 22.385,79.06 22.02,78.695 v1(22.02,76.52) ; U9.9 24.2,26.675 24.2,24.875 24.687,24.388 C25.2 24.687,22.813 26.15,21.35 v1(26.55,21.35) 28.238,23.038 C34.2 ; C19.2@25.9,12.863 C20.2 v1(27.6,11.85) ; v1(27.65,40.975) 27.675,41 U9.60 27.7,42.525 27.7,44.275 28.362,44.937 C28.2 ; U5.7 31.03,82.87 v1(31.075,82.825) ; v1(31.675,25.372) 32.153,25.372 33.037,24.488 C36.1 ; v1(33.475,9.475) C3.2 ; U9.41 35.1,36.1 35.3,36.3 37.75,36.3 37.962,36.088 C26.2 ; U9.49 34.1,40.125 35.3,40.125 35.725,40.55 35.725,41.2 35.962,41.437 C27.2 ; v1(34.525,53.55) C31.2 ; 34.875,53.55 35.237,53.188 C30.2@35.237,52.25 ; C35.1 35.35,23.428 v1(35.352,23.426) ; v1(35.86,70.14) v1@35.9,70.1 ; U2.1 v1(39.45,17.65) ; C32.2 C33.2@41.909,25.25 ; C33.2 v1(41.934,26.891) ; v1(43.3,53.85) C5.1 44.613,53.954 C4.1 ; v1@44.825,90.425 v1(44.86,90.46) ; v1(48.05,54.425) v1@48.05,54.575 ; U3.7 50.175,47.025 50.525,47.025 50.925,46.625 v1(50.925,45.5) 51.391,45.034 C8.2 ; v1(50.275,15.25) v1@50.325,15.2 ; U3.11 U3.10 v1(54.8,49.6) ; U8.1 U8.2 v1(79.95,23.675)
  Top Layer w0.3: v1(12.398,9.425) U6.7 ; U6.8 v1(15.852,8.155) ; U9.9 v1(24.175,28.92) ; v1(31.675,25.372) U9.24 ; U9.25 v1(32.175,28.92) ; v1(32.746,36.1) U9.41 ; v1(32.746,40.1) U9.49 ; C37.1 46.287,27.263 v1(46.3,27.25) ; v1(58.466,80.413) 58.724,80.413 LED1.2 ; U1.1 v1(66.775,24) ; v1(73.741,30.038) C23.2 ; C22.2 v1(84.037,30.409) ; C21.2 85.151,66.038 v1(85.409,66.038) ; v1(84.791,31.086) R19.2
  Top Layer w0.5: v1(43.825,37.15) 43.832,37.157 X7.19 ; v1(46,39) 46.005,38.995 X7.17 ; X7.15 v1(47.275,39) ; X7.5 v1(53.625,39.025) ; X7.3 54.895,38.995 v1(54.9,39) ; v1(70.266,19.809) R35.1
  Bottom Layer w0.15: v1@2.875,33.075 v1(2.925,33.125) ; v1@21.95,76.45 v1(22.02,76.52) ; v1@27.575,11.825 v1(27.6,11.85) ; X6.10 v1(35.86,70.14) ; v1(35.352,23.426) 35.352,23.273 v1@35.375,23.25 ; v1@39.375,17.725 v1(39.45,17.65) ; v1(44.86,90.46) X5.2 ; C11.1 46.409,54.816 46.8,54.425 v1(48.05,54.425) 49.025,53.45 U4.13 ; v1(46.575,51.025) 46.625,50.975 U4.12 U4.11 U4.10 U4.9 ; v1(48.125,46.7) 48.125,47.2 U4.8
  Bottom Layer w0.3: R6.2 53.632,57.741 v1(53.889,57.741)
  Bottom Layer w0.5: v1(50.275,15.25) BT1.2 ; C10.1 v1(55.65,58.825) ; C9.1 59.087,57.512 v1(59.1,57.525)
  other v2: 62.625,21.475 62.65,24.7 61.825,26.225
NetBT1_1: BT1.1 BT1.3 D1.1 | length 24.2
  Top Layer w0.15: v1(47.568,25.843) D1.1 ; v1(52.45,26.275) 52.8,25.925 52.8,10.925 v1(52.475,10.6)
  Bottom Layer w0.15: v1(47.568,25.843) 49.818,25.843 BT1.1 52.425,26.3 v1(52.45,26.275)
  Bottom Layer w0.5: BT1.3 v1(52.475,10.6)
NetC6_1: C6.1 U3.12 | length 5
  Top Layer w0.15: U3.12 52.325,51.2 54.066,52.941 C6.1@54.066,54.525
NetC6_2: C6.2 U3.13 | length 2.8
  Top Layer w0.15: U3.13 51.4,52.4 52.034,53.034 52.034,54.525
NetC8_1: C8.1 U3.6 | length 4.9
  Top Layer w0.15: U3.6 48.6,47.25 49.359,46.491 C8.1
NetC9_2: C9.2 C10.2 U4.16 | length 10.2
  Bottom Layer w0.15: U4.16 50.975,53.85 51.65,54.525 55.4,54.525 55.65,54.775 C10.2 C9.2@57.871,55.734
NetC11_2: C11.2 C13.2 U4.14 | length 8.6
  Bottom Layer w0.15: C13.2 49.113,58.638 48.441,57.966 C11.2 49.675,55.016 U4.14
NetC13_1: C13.1 R6.1 | length 5.7
  Bottom Layer w0.15: C13.1 50.637,56.413 51.341,55.709 R6.1
NetC14_1: C14.1 R7.2 R8.1 U5.1 | length 33.9
  Top Layer w0.15: R7.2 R8.1@14.075,77.416 ; R8.1 C14.1@17.004,77.366 ; C14.1 17.812,77.412 18.55,78.15 18.55,84.6 19.3,85.35 25.426,85.35 26.95,83.826 26.95,75.95 27.65,75.25 U5.1
NetC15_1: C15.1 R9.2 R10.1 U5.3 | length 27.7
  Top Layer w0.15: R9.2 C15.1@17.129,81.866 ; C15.1 17.862,81.887 18.25,82.275 18.25,84.875 18.444,85.069 18.831,85.456 19.025,85.65 25.55,85.65 27.25,83.95 27.25,78.35 27.81,77.79 U5.3
NetC16_1: C16.1 R11.2 R12.1 U5.5 | length 22.4
  Top Layer w0.15: R11.2 14.025,86.266 R12.1 14.304,85.987 C16.1 25.637,85.987 27.55,84.074 27.55,80.875 28.095,80.33 U5.5
NetC17_1: C17.1 R13.2 R14.1 U5.9 | length 19.6
  Top Layer w0.15: R13.2 R14.1 C17.1@16.646,72.975 ; C17.1 18.85,74.871 18.85,80.975 19.475,81.6 U5.9
NetC22_1: C22.1 J1.1 J1.2 R16.1 U8.3 U8.4 | length 17.1
  Top Layer w0.15: C22.1 81.725,29.575 81.525,29.375 81.525,28.75 80.9,28.125 U8.4 U8.3 80.9,19.375 82.025,18.25 R16.1
NetC23_1: C23.1 R17.2 U9.10 | length 62.1
  Top Layer w0.15: U9.10 24.675,25.125 25.875,23.925 v1(25.875,22.6) ; v1(73.313,31.562) C23.1 75.262,31.562 75.516,31.816 R17.2
  Bottom Layer w0.15: v1(25.875,22.6) 67.95,22.6 72.35,27 72.35,31.225 72.687,31.562 v1(73.313,31.562)
NetC30_1: C30.1 G1.1 R21.2 U9.50 | length 18.2
  Top Layer w0.15: C30.1 33.738,51.687 34.05,51.375 35.55,51.375 35.85,51.075 35.85,48.234 ; U9.50 34.425,40.95 R21.2 35.85,48.234 ; G1.1 37.991,48.234 35.85,48.234
NetC31_1: C31.1 G1.2 R21.1 U9.51 | length 22
  Top Layer w0.15: U9.51 32.875,43.2 32.875,50.275 ; R21.1 32.884,50.266 32.875,50.275 ; G1.2@38.741,56.916 C31.1 33.066,56.916 32.875,56.725 32.875,50.275
NetC32_1: C32.1 G2.2 R23.2 U9.28 | length 9.8
  Top Layer w0.15: U9.28 37.525,29.6 37.909,29.216 R23.2 C32.1@37.909,25.325 ; G2.2@37.834,23.309 C32.1
NetC33_1: C33.1 G2.1 R23.1 U9.29 | length 16.2
  Top Layer w0.15: U9.29 39.425,30.1 39.941,29.584 R23.1 43.3,28.075 43.966,27.409 C33.1 G2.1@43.966,23.141
NetC34_1: C34.1 L2.2 U9.22 | length 6.1
  Top Layer w0.15: L2.2 29.1,22.2 29.762,22.862 C34.1 29.762,24.462 30.025,24.725 30.375,24.725 30.675,25.025 U9.22
NetC35_2: C35.2 U9.26 | length 3.3
  Top Layer w0.15: U9.26 34.075,28.3 35.35,27.025 C35.2
NetC36_2: C36.2 L3.2 U9.23 | length 5.6
  Top Layer w0.15: U9.23 31.15,26.675 31.15,25.154 31.513,24.791 C36.2 31.513,22.837 32.125,22.225 L3.2
NetC37_2: C37.2 D1.3 U9.30 | length 15.3
  Top Layer w0.15: U9.30 39.838,30.6 41.488,28.95 45.187,28.95 C37.2 48.514,28.787 D1.3
NetL1_1: L1.1 U1.7 | length 1.5
  Top Layer w0.5: 65.475,18.175 U1.7
NetLED1_1: LED1.1 R15.2 | length 1.8
  Top Layer w0.15: R15.2 59.2,82.037 LED1.1
NetLED2_1: LED2.1 R24.2 | length 2.5
  Top Layer w0.15: LED2.1 5.662,26.7 R24.2
NetLED3_1: LED3.1 R22.2 | length 2.4
  Top Layer w0.15: LED3.1 R22.2
NetLED4_1: LED4.1 R25.2 | length 2.4
  Top Layer w0.15: LED4.1 5.562,29.775 R25.2
NetLED5_1: LED5.1 R26.2 | length 2.4
  Top Layer w0.15: LED5.1 R26.2
NetLED6_1: LED6.1 R27.2 | length 2.5
  Top Layer w0.15: LED6.1 5.512,35.95 R27.2
NetLED7_1: LED7.1 R28.2 | length 2.6
  Top Layer w0.15: LED7.1 5.612,38.95 R28.2
NetLED8_1: LED8.1 R29.2 | length 2.6
  Top Layer w0.15: LED8.1 5.462,41.925 R29.2
NetR1_1: R1.1 U1.8 | length 4.7
  Top Layer w0.15: U1.8 U1.8@66.134,19.691
  Top Layer w0.5: U1.8 67.7,19.7 69.225,18.175 R1.1
NetR2_1: R2.1 U3.2 U9.53 | length 33.3
  Top Layer w0.15: v1(30.975,39.225) 30.975,41 31.175,41.2 U9.53 ; R2.1 46.134,49.634 v1(46.65,50.15) 47.7,51.2 U3.2
  Bottom Layer w0.15: v1(30.975,39.225) 31.35,38.85 43.851,38.85 44.65,39.649 44.65,48.15 v1(46.65,50.15)
NetR3_1: R3.1 U3.3 U9.54 | length 32.9
  Top Layer w0.15: v1(30.275,37.975) 30.275,40.9 30.675,41.3 U9.54 ; v1(45.2,45.7) 45.641,46.141 R3.1 45.641,48.366 47.675,50.4 U3.3
  Bottom Layer w0.15: v1(30.275,37.975) 30.85,38.55 43.975,38.55 45.2,39.775 v1(45.2,45.7)
NetR4_1: R4.1 U4.2 U9.82 | length 82.2
  Top Layer w0.15: U9.82 18.377,37.702 v1(20.401,37.702)
  Bottom Layer w0.15: v1(20.401,37.702) 20.4,37.701 20.4,32.876 22.981,30.295 60.244,30.295 62.125,32.176 62.125,50.224 60.883,51.466 R4.1 60.2,52.375 59.85,52.725 56.5,52.725 56,52.225 56,50.775 55.65,50.425 53.775,50.425 53.65,50.3 U4.2@51.925,50.3
NetR5_1: R5.1 U4.3 U9.83 | length 79.2
  Top Layer w0.15: U9.83@18.35,37.175 v1(21.175,37.175)
  Bottom Layer w0.15: v1(21.175,37.175) 21.175,32.525 23.105,30.595 60.12,30.595 61.825,32.3 61.825,50.1 61.45,50.475 57.85,50.475 57.6,50.725 R5.1 56.209,50.125 54.55,50.125 54.1,49.675 U4.3
NetR15_1: R15.1 U7.13 | length 3.8
  Top Layer w0.15: R15.1 60.934,85.691 U7.13
NetR17_1: R17.1 U8.6 | length 4.5
  Top Layer w0.15: R17.1 77.05,27.4 77.475,26.975 U8.6
NetR18_2: R18.2 R19.1 U9.11 | length 69
  Top Layer w0.15: U9.11 25.175,25.175 26.575,23.775 26.575,23.125 v1(26.576,23.126) ; v1(80.05,33.125) R18.2 81.466,31.716 82.025,32.275 R19.1
  Bottom Layer w0.15: v1(26.576,23.126) 26.802,22.9 67.825,22.9 72.05,27.125 72.05,31.675 73.5,33.125 v1(80.05,33.125)
NetR20_2: R20.2 U9.37 X7.2 | length 31.2
  Top Layer w0.15: U9.37 35.575,34.1 36.925,32.75 40.818,32.75 43.6,35.532 55.593,35.532 56.165,34.96 X7.2 58.068,33.093 59.513,34.538 R20.2
NetR22_1: R22.1 U9.96 | length 14.2
  Top Layer w0.15: R22.1 11.425,23.675 12.05,24.3 12.05,29.575 13.075,30.6 U9.96
NetR24_1: R24.1 U9.95 | length 11.7
  Top Layer w0.15: R24.1 11.475,26.7 11.75,26.975 11.75,29.699 13.151,31.1 U9.95
NetR25_1: R25.1 U9.94 | length 9.1
  Top Layer w0.15: R25.1 11.401,29.775 13.226,31.6 U9.94
NetR26_1: R26.1 U9.93 | length 8.8
  Top Layer w0.15: R26.1 12.025,33.125 13.05,32.1 U9.93
NetR27_1: R27.1 U9.81 | length 9.2
  Top Layer w0.15: R27.1 11.075,35.95 13.225,38.1 U9.81
NetR28_1: R28.1 U9.80 | length 8.4
  Top Layer w0.15: R28.1 11.7,38.95 12.05,38.6 U9.80
NetR29_1: R29.1 U9.70 | length 15.1
  Top Layer w0.15: R29.1 18.825,41.925 20.3,40.45 22.225,40.45 22.675,40.9 U9.70
NetR31_1: R31.1 U9.34 X7.4 | length 26.6
  Top Layer w0.15: U9.34 35.175,32.6 36.55,31.225 40.375,31.225 41.325,30.275 49.075,30.275 50.625,28.725 54.6,28.725 54.9,29.025 R31.1 54.9,33.088 X7.4
NetR32_1: R32.1 U9.35 X7.8 | length 25.1
  Top Layer w0.15: U9.35 35.275,33.1 36.5,31.875 41.043,31.875 44.1,34.932 52.118,34.932 52.355,34.695 X7.8 52.355,29.736 R32.1
NetR33_1: R33.1 X7.9 | length 15.6
  Top Layer w0.15: R33.1 39.95,38.3 41.375,39.725 50.6,39.725 51.085,39.24 X7.9
NetR33_2: R33.2 U9.38 | length 5.9
  Top Layer w0.3: U9.38 R33.2@39.966,34.6
NetR34_1: R34.1 R35.2 U1.5 | length 10.1
  Top Layer w0.3: U1.5 64.175,20.857 64.818,21.5 R35.2
  Top Layer w0.5: R35.2 69.15,22.416 69.15,23.834 R34.1
NetU2_2: U2.2 U9.3 | length 32.9
  Top Layer w0.15: U9.3 21.175,28.625 22.2,29.65 32.35,29.65 32.925,29.075 32.925,27.7 34.175,26.45 34.175,17.435 37.005,14.605 U2.2
NetU2_3: U2.3 U9.4 | length 25.4
  Top Layer w0.15: U9.4 21.675,23.15 22.75,22.075 23.9,22.075 32.64,13.335 U2.3
NetU2_4: U2.4 U9.2 | length 26.7
  Top Layer w0.15: U9.2 20.675,23.45 22.35,21.775 23.775,21.775 33.485,12.065 U2.4
NetU2_5: U2.5 U9.64 | length 46.1
  Top Layer w0.15: U9.64 25.675,33.775 19.775,27.875 19.775,23.926 22.226,21.475 23.623,21.475 34.303,10.795 U2.5
NetU3_4: U3.4 U9.56 | length 60.3
  Top Layer w0.15: U9.56 29.675,46.899 26.725,49.849 26.725,59.851 28.574,61.7 41.375,61.7 42.175,60.9 42.175,45.975 43.05,45.1 45.85,45.1 46.8,46.05 46.8,48.726 47.674,49.6 U3.4
NetU3_5: U3.5 U9.55 | length 34.1
  Top Layer w0.15: U9.55 30.175,41.3 29.725,40.85 29.725,37.5 v1(30.25,36.975) ; v1(47.175,45) 47.175,48.325 47.65,48.8 U3.5
  Bottom Layer w0.15: v1(30.25,36.975) 31.525,38.25 44.099,38.25 45.5,39.651 45.5,44.725 45.775,45 v1(47.175,45)
NetU3_9: U3.9 U9.57 | length 67.2
  Top Layer w0.15: U9.57 29.175,44.351 29.375,44.551 29.375,46.774 26.425,49.724 26.425,59.976 28.449,62 55.125,62 56.175,60.95 56.175,49.25 54.825,47.9 53.2,47.9 52.3,48.8 U3.9
NetU4_6: U4.6 U9.85 | length 52.4
  Top Layer w0.15: U9.85 21.578,36.1 22.277,35.402 v1(22.126,35.402)
  Bottom Layer w0.15: v1(22.126,35.402) 22.375,35.153 22.375,31.841 23.321,30.895 48.219,30.895 49.975,32.651 49.975,45.75 50.325,46.1 U4.6
NetU4_7: U4.7 U9.84 | length 51.8
  Top Layer w0.15: U9.84 v1(21.825,36.6)
  Bottom Layer w0.15: v1(21.825,36.6) 22.675,35.75 22.675,31.965 23.445,31.195 48.095,31.195 49.675,32.775 U4.7
NetU5_2: U5.2 U9.71 | length 43.5
  Top Layer w0.15: U9.71 22.175,44.798 23.975,46.598 23.975,60.5 23,61.475 v1(23,70.325) ; v1(23,72.8) 23.025,72.775 29.55,72.775 30.575,73.8 30.575,76.175 30.23,76.52 U5.2
  Bottom Layer w0.15: v1(23,70.325) v1(23,72.8)
NetU5_4: U5.4 U9.72 | length 47.3
  Top Layer w0.15: U9.72 21.725,42.55 21.725,44.772 23.675,46.722 23.675,60.376 22.7,61.351 22.7,69.3 22.275,69.725 v1(22.275,71.025) ; v1(22.275,72.225) 22.3,72.2 29.399,72.2 30.875,73.676 30.875,78.625 30.44,79.06 U5.4
  Bottom Layer w0.15: v1(22.275,71.025) v1(22.275,72.225)
NetU5_6: U5.6 U9.76 | length 57.2
  Top Layer w0.15: v1(15.288,40.575) 18.25,40.575 U9.76 ; U5.6 30.425,81.6 31.175,80.85 31.175,73.551 v1(29.274,71.65)
  Bottom Layer w0.15: v1(15.288,40.575) 20.463,45.75 20.5,45.75 20.5,65.696 21.854,67.05 29.329,67.05 29.85,67.571 29.85,71.074 v1(29.274,71.65)
NetU5_8: U5.8 U9.73 | length 44.2
  Top Layer w0.15: U9.73 21.175,44.646 23.375,46.846 23.375,60.251 22.4,61.226 22.4,69.176 21.375,70.201 v1(21.375,70.35) ; v1(21.375,82.925) 23.382,82.925 U5.8
  Bottom Layer w0.15: v1(21.375,70.35) v1(21.375,82.925)
NetU6_1: U6.1 U9.97 | length 19.1
  Top Layer w0.15: U6.1 17.67,17.045 18.025,17.4 18.025,25.176 16.2,27.001 16.2,29.299 17.001,30.1 U9.97
NetU6_3: U6.3 U9.98 | length 21.4
  Top Layer w0.15: U6.3 18.08,14.505 18.325,14.75 18.325,25.301 16.5,27.126 16.5,29.175 16.925,29.6 U9.98
NetU6_5: U6.5 U9.99 | length 23.4
  Top Layer w0.15: U6.5 18.015,11.965 18.625,12.575 18.625,25.425 16.8,27.25 16.8,28.85 17.05,29.1 U9.99
NetU6_9: U6.9 U9.100 | length 25.9
  Top Layer w0.15: U9.100 17.327,28.6 17.1,28.373 17.1,27.374 18.95,25.524 18.95,9.35 20.145,8.155 U6.9
NetU7_2: U7.2 U9.45 | length 83.5
  Top Layer w0.15: U9.45 37.45,38.1 40.275,40.925 82.575,40.925 86.125,44.475 86.125,71.2 85.125,72.2 U7.2
NetU7_3: U7.3 U9.44 | length 86.3
  Top Layer w0.15: U9.44 37.374,37.6 40.399,40.625 82.699,40.625 86.425,44.351 86.425,73.025 85.25,74.2 U7.3
NetU7_5: U7.5 U9.43 | length 90.5
  Top Layer w0.15: U9.43 37.299,37.1 40.524,40.325 82.824,40.325 86.725,44.226 86.725,75.9 U7.5
NetU7_6: U7.6 U9.65 | length 105.9
  Top Layer w0.15: U9.65 25.175,43.751 v1(25.526,44.102) ; v1(27.075,47.575) 26.926,47.575 26.125,48.376 26.125,60.1 28.325,62.3 54.5,62.3 57.45,65.25 57.45,87.3 59.375,89.225 63.7,89.225 72.725,80.2 U7.6
  Bottom Layer w0.15: v1(25.526,44.102) 27.075,45.651 v1(27.075,47.575)
NetU7_9: U7.9 U9.42 | length 99.2
  Top Layer w0.15: U9.42 37.223,36.6 40.648,40.025 82.948,40.025 87.025,44.102 87.025,83.6 U7.9
NetU7_12: U7.12 U9.46 | length 80.3
  Top Layer w0.15: U9.46 37.526,38.6 40.151,41.225 65.325,41.225 67.5,43.4 67.5,81.125 U7.12
NetU7_16: U7.16 U9.47 | length 71.6
  Top Layer w0.15: U9.47 34.1,39.075 37.576,39.075 40.026,41.525 65.201,41.525 67.2,43.524 67.2,73.425 U7.16
NetU9_36: U9.36 X7.6 | length 23.1
  Top Layer w0.15: U9.36 35.325,33.6 36.6,32.325 41.018,32.325 43.925,35.232 53.093,35.232 53.625,34.7 X7.6
NetU9_58: U9.58 X5.8 | length 53.5
  Top Layer w0.15: U9.58 28.675,44.275 29.075,44.675 29.075,46.65 28.8,46.925 26.625,46.925 25.775,47.775 25.775,60.251 28.149,62.625 42.599,62.625 44.725,64.751 44.725,74.625 45.32,75.22 X5.8
NetU9_59: U9.59 X6.3 | length 56.6
  Top Layer w0.15: U9.59 28.175,39.9 v1(28.2,39.875)
  Bottom Layer w0.15: v1(28.2,39.875) 28.2,42.625 37.45,51.875 37.45,85.675 35.205,87.92 X6.3
NetU9_62: U9.62 X5.6 | length 59.4
  Top Layer w0.15: U9.62 26.675,43.449 26.538,43.586 26.538,44.286 25.475,45.349 25.475,60.376 28.024,62.925 42.475,62.925 44.425,64.875 44.425,75.725 45.025,76.325 47.875,76.325 48.425,76.875 48.425,79.925 48.05,80.3 X5.6
NetU9_63: U9.63 X5.7 | length 54
  Top Layer w0.15: U9.63 26.175,44.225 25.175,45.225 25.175,60.5 27.9,63.225 42.351,63.225 44.125,64.999 44.125,76.875 45.01,77.76 X5.7
NetU9_66: U9.66 X6.4 | length 56.3
  Top Layer w0.15: U9.66 24.726,42.449 v1(24.726,39.575)
  Bottom Layer w0.15: v1(24.726,39.575) 37.15,51.999 37.15,81.25 37.15,84.05 35.82,85.38 X6.4
NetU9_67: U9.67 X5.3 | length 67.3
  Top Layer w0.15: U9.67 24.175,45.525 24.875,46.225 24.875,60.624 27.776,63.525 42.226,63.525 43.825,65.124 43.825,82.825 44.975,83.975 48.05,83.975 48.6,84.525 48.6,87.175 47.855,87.92 X5.3
NetU9_68: U9.68 X5.4 | length 61.9
  Top Layer w0.15: U9.68 23.675,45.449 24.575,46.349 24.575,60.749 27.651,63.825 42.102,63.825 43.525,65.248 43.525,83.9 45.005,85.38 X5.4
NetU9_69: U9.69 X5.5 | length 75.9
  Top Layer w0.15: U9.69 23.175,45.374 24.275,46.474 24.275,60.873 27.527,64.125 41.978,64.125 43.225,65.372 43.225,87.65 44.75,89.175 48.15,89.175 48.9,88.425 48.9,84.401 48.24,83.741 48.24,82.84 X5.5
NetU9_77: U9.77 X6.6 | length 53.7
  Top Layer w0.15: U9.77 19.625,40.1 19.675,40.05 19.699,40.05 v1(19.776,40.127)
  Bottom Layer w0.15: v1(19.776,40.127) 19.953,39.95 20.5,39.95 21.4,40.85 21.4,65.324 22.226,66.15 29.701,66.15 30.75,67.199 30.75,78.725 32.325,80.3 X6.6
NetU9_78: U9.78 X6.7 | length 52
  Top Layer w0.15: U9.78 21.325,39.6 21.475,39.75 v1(21.475,39.85)
  Bottom Layer w0.15: v1(21.475,39.85) 21.7,39.85 21.7,65.199 22.351,65.85 29.826,65.85 31.05,67.074 31.05,76.55 32.26,77.76 X6.7
NetU9_79: U9.79 X6.8 | length 50.3
  Top Layer w0.15: U9.79 20.775,39.1 22.025,39.1 v1(22,39.125)
  Bottom Layer w0.15: v1(22,39.125) 22,65.075 22.475,65.55 29.95,65.55 31.35,66.95 31.35,74.425 32.145,75.22 X6.8
NetU9_86: U9.86 X6.1 | length 77
  Top Layer w0.15: v1(14.776,36.377) 14.752,36.377 15.279,35.85 16.625,35.85 16.875,35.6 U9.86
  Bottom Layer w0.15: v1(14.776,36.377) 14.65,36.502 14.65,37.501 21.1,43.951 21.1,65.448 22.102,66.45 29.577,66.45 30.45,67.323 30.45,88.076 31.549,89.175 34.875,89.175 35.7,90 35.7,92.475 35.175,93 X6.1
NetU9_87: U9.87 X6.2 | length 73.6
  Top Layer w0.15: v1(14.25,35.45) 16.35,35.45 16.7,35.1 U9.87
  Bottom Layer w0.15: v1(14.25,35.45) 14.25,37.525 20.8,44.075 20.8,65.572 21.978,66.75 29.453,66.75 30.15,67.447 30.15,89.725 30.885,90.46 X6.2
NetU9_90: U9.90 X5.9 | length 58.5
  Top Layer w0.15: U9.90 23.125,33.6 v1(24.35,34.825)
  Bottom Layer w0.15: v1(24.35,34.825) 28.775,39.25 28.775,42.776 37.75,51.751 37.75,71.9 38.53,72.68 X5.9
NetU9_91: U9.91 X5.10 | length 56.7
  Top Layer w0.15: U9.91 19.55,33.1 19.75,33.3 23.825,33.3 v1(24.25,33.725)
  Bottom Layer w0.15: v1(24.25,33.725) 29.075,38.55 29.075,42.651 38.05,51.626 38.05,69.6 38.59,70.14 X5.10
NetU9_92: U9.92 X6.5 | length 63.5
  Top Layer w0.15: U9.92 23.1,32.6 23.25,32.75 v1(23.65,32.75)
  Bottom Layer w0.15: v1(23.65,32.75) 23.65,39.65 24.275,40.275 25.001,40.275 36.85,52.124 36.85,81.5 35.51,82.84 X6.5
RESET_B: R30.2 U9.52 X7.10 | length 34.4
  Top Layer w0.15: v1(31.675,34.75) 31.65,34.775 31.65,42.475 U9.52 31.75,42.575 R30.2 ; v1(42.5,31.9) 43.1,31.9 44.025,30.975 50.75,30.975 51.085,31.31 X7.10
  Bottom Layer w0.15: v1(31.675,34.75) 31.675,33.075 32.85,31.9 v1(42.5,31.9)
VBAT: C2.1 J2.1 J2.3 J2.5 J2.7 R16.2 R18.1 U1.2 U1.3 U8.5 | length 37
  Top Layer w0.15: R16.2@73.35,18.25 R16.2 75.45,25.125 76.175,25.85 79.5,25.85 79.95,26.3 U8.5 ; U8.5@80.05,27.075 R18.1
  Top Layer w0.5: U1.3 U1.2 65.475,26.584 C2.1 71.4,27 75.45,22.95 R16.2
pads on no net: G2.3 G2.4 U2.7 U2.8 U2.9 U2.10 U2.11 U2.12 U2.13 U2.14 U3.8 U5.10 U5.12 U7.4 U7.7 U7.8 U7.11 U7.15 U7.17 U7.18 U7.19 U7.20 U9.1 U9.5 U9.6 U9.7 U9.12 U9.13 U9.14 U9.15 U9.16 U9.17 U9.18 U9.19 U9.20 U9.21 U9.27 U9.31 U9.32 U9.33 U9.39 X7.7 X7.11 X7.12 X7.13 X7.14 X7.16 X7.18 X7.20

## Polygon pours and split planes (outlines as drawn)
NetL1_1 on Top Layer "Top Layer-No Net" (solid, pour order 20): 65.25,18.5 65.25,14.625 67.525,14.625 67.525,18.5 65.25,18.5
3.3V on Top Layer "Top Layer-No Net" (solid, pour order 19): 58.55,18.5 58.55,14.625 65.1,14.625 65.1,18.5
GND on Top Layer "Top Layer-No Net" (solid, pour order 12): 64.65,28.275 64.65,25.532 64.65,25.433 64.472,25.433 64.472,18.9 60.7,18.9 60.7,28.275
VBAT on Top Layer "Top Layer-No Net" (solid, pour order 15): 79.097,2.975 79.12,2.95 82.775,2.95 82.775,7.9 82.752,7.925 82.564,7.725 79.05,7.725
VBAT on Top Layer "Top Layer-No Net" (solid, pour order 16): 72.097,2.975 72.12,2.95 75.775,2.95 75.775,7.9 75.752,7.925 75.564,7.725 72.05,7.725
VBAT on Top Layer "Top Layer-No Net" (solid, pour order 17): 65.097,2.975 65.12,2.95 68.775,2.95 68.775,7.9 68.752,7.925 68.564,7.725 65.05,7.725
VBAT on Top Layer "Top Layer-No Net" (solid, pour order 18): 58.097,2.975 58.12,2.95 61.775,2.95 61.775,7.9 61.752,7.925 61.564,7.725 58.05,7.725
VBAT on Top Layer "Top Layer-No Net" (solid, pour order 14): 71.45,23.575 79.225,23.575 79.25,23.547 79.25,9.6 71.475,9.6
VBAT on Top Layer "Top Layer-No Net" (solid, pour order 13): 58.025,7.264 58.048,7.25 82.75,7.25 82.75,9.975 58.071,9.975
NetC22_1 on Top Layer "Top Layer-No Net" (solid, pour order 11): 82.25,23.5 82.25,13 99,13 99,21 92.5,21 92.5,23.5 82.25,23.5
GND on Internal Plane 1 (split plane): 99.49,0.51 0.51,0.51 0.51,99.49 99.49,99.49
3.3V on Internal Plane 2 (split plane): 99.49,0.51 0.51,0.51 0.51,99.49 99.49,99.49

## Keep-outs
Keep-Out Layer:
  lines w0.2: 0.5,0.5 99.5,0.5 99.5,99.5 0.5,99.5 0.5,0.5

## Silkscreen, mask and mechanical layers (free items; w line width, h text height)
Top Overlay:
  lines w0.254: 1.35,64.375 1.35,49.1 4.55,45.9 4.55,42.675 ; 8.9,43.325 8.9,48.825 9.325,49.25 9.325,64.475 ; 10.575,97.4 10.575,88.9 10.9,88.575 10.9,87.4 ; 14.2,87.3 15.675,88.775 15.675,97.55 ; 16.975,86.85 17.6,87.475 20.075,87.475 21.35,88.75 21.35,97.25 ; 21.65,19.45 26.075,19.45 27.375,20.75 27.375,24.125 ; 31.05,22.925 33.575,22.925 33.9,22.6 33.9,18.025 ; 43.35,61.2 43.35,57.425 43.65,57.125 45.2,57.125 45.375,56.95 45.375,56.775 ; 45.05,25.225 45.1,25.275 45.525,25.275 45.65,25.15 45.65,24.45 46.025,24.075 52.075,24.075 ; 46.2,29.15 47.075,30.025 47.125,30.025 48.35,30.025 48.875,30.55 48.875,31.525
  text "M. Favre-Bulle / 12.06.2012" at 94.3,35.075 h1.52 r90
  text "Controle quadricoptere V1.1" at 91.45,34.95 h1.52 r90
Mechanical 1:
  the board outline again, w0.2

## Dimensions
0,0 to 100,0 on Mechanical 2

## Text inside footprints (layer, text, board x,y; h text height)
X1: Top Overlay "S" at 6.675,81.45 h1.52 r270
X2: Top Overlay "S" at 6.675,71.45 h1.52 r270
X3: Top Overlay "S" at 6.675,14.45 h1.52 r270
X4: Top Overlay "S" at 93.325,85.55 h1.52 r90